# Altium PCB TCRT5000_SMT.PcbDoc
Units mil, origin at the board's own origin, x right, y up, seen from the top; angles counter-clockwise.
Board outline 6000 x 4000 mil, 2 copper layers (Top Layer, Bottom Layer); 18 components, 12 nets, 52 pads, 0 vias.
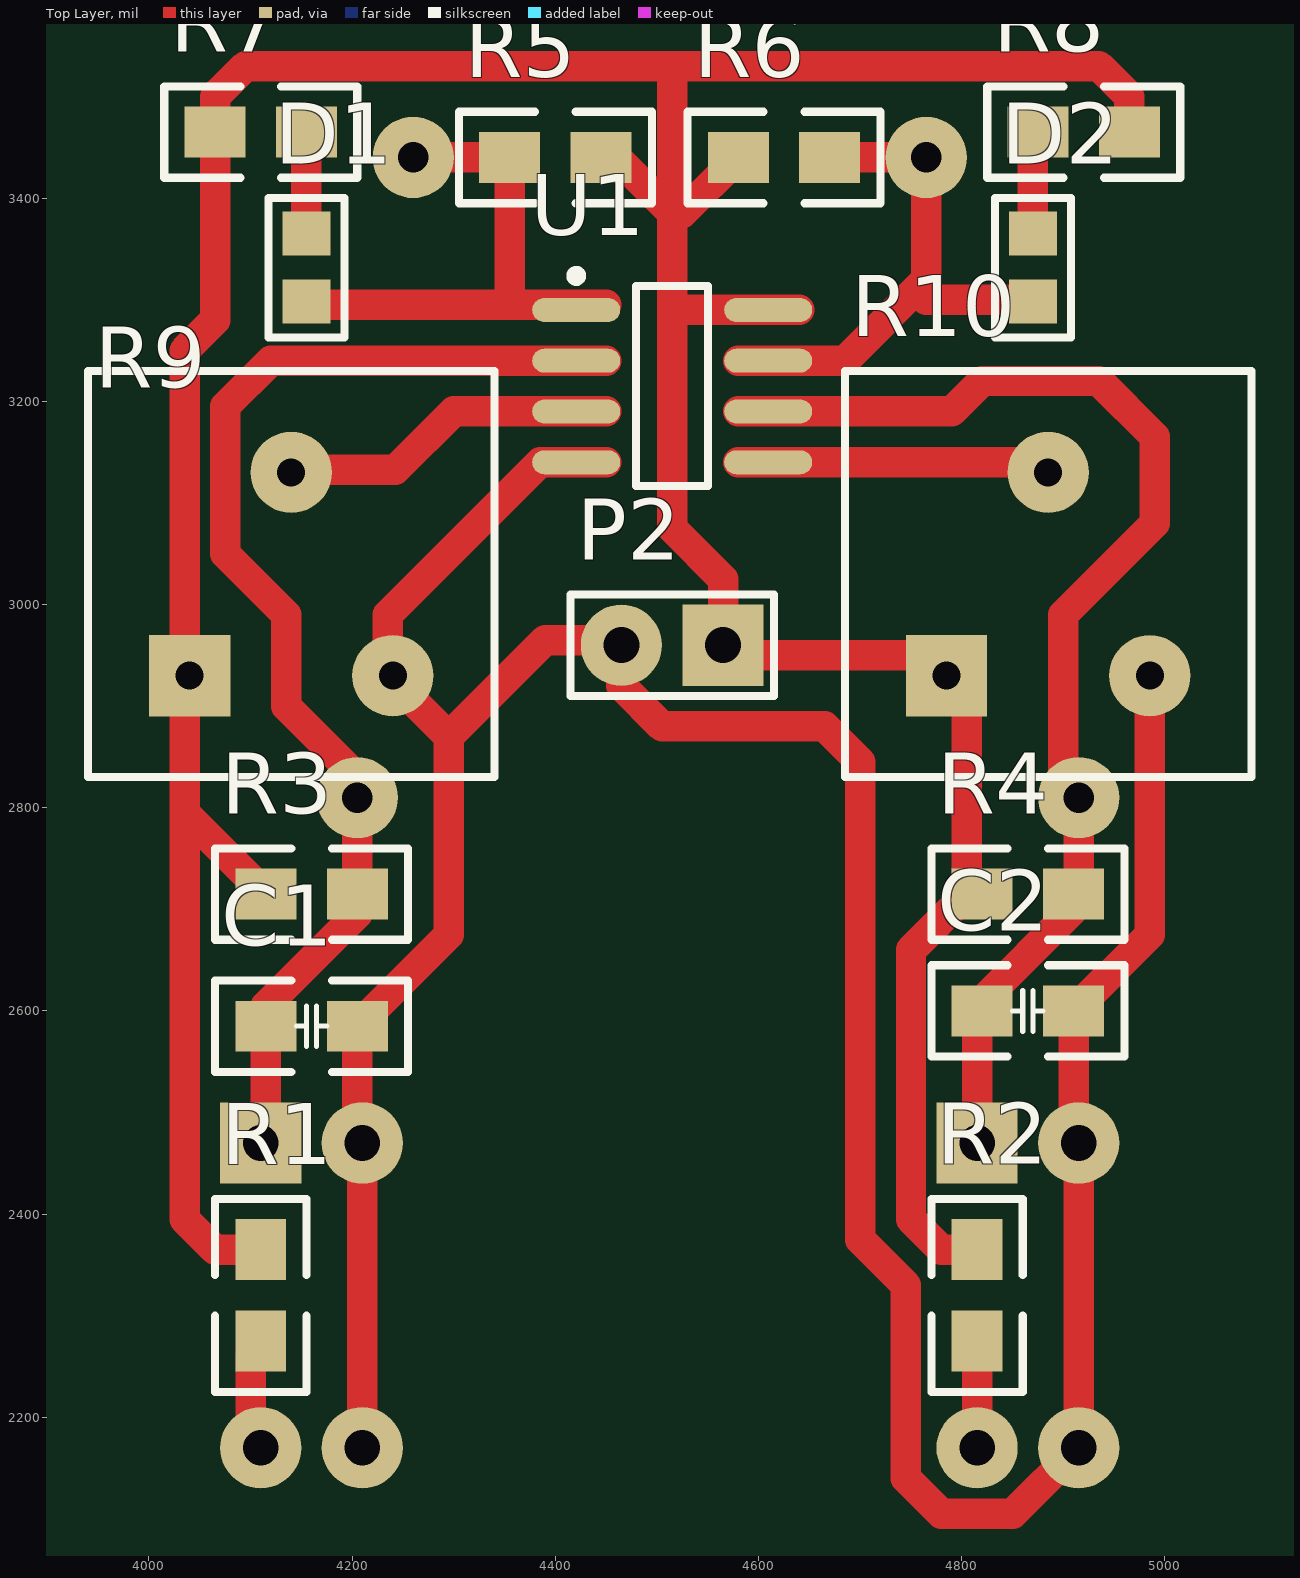
[diagram p0: Top Layer view]
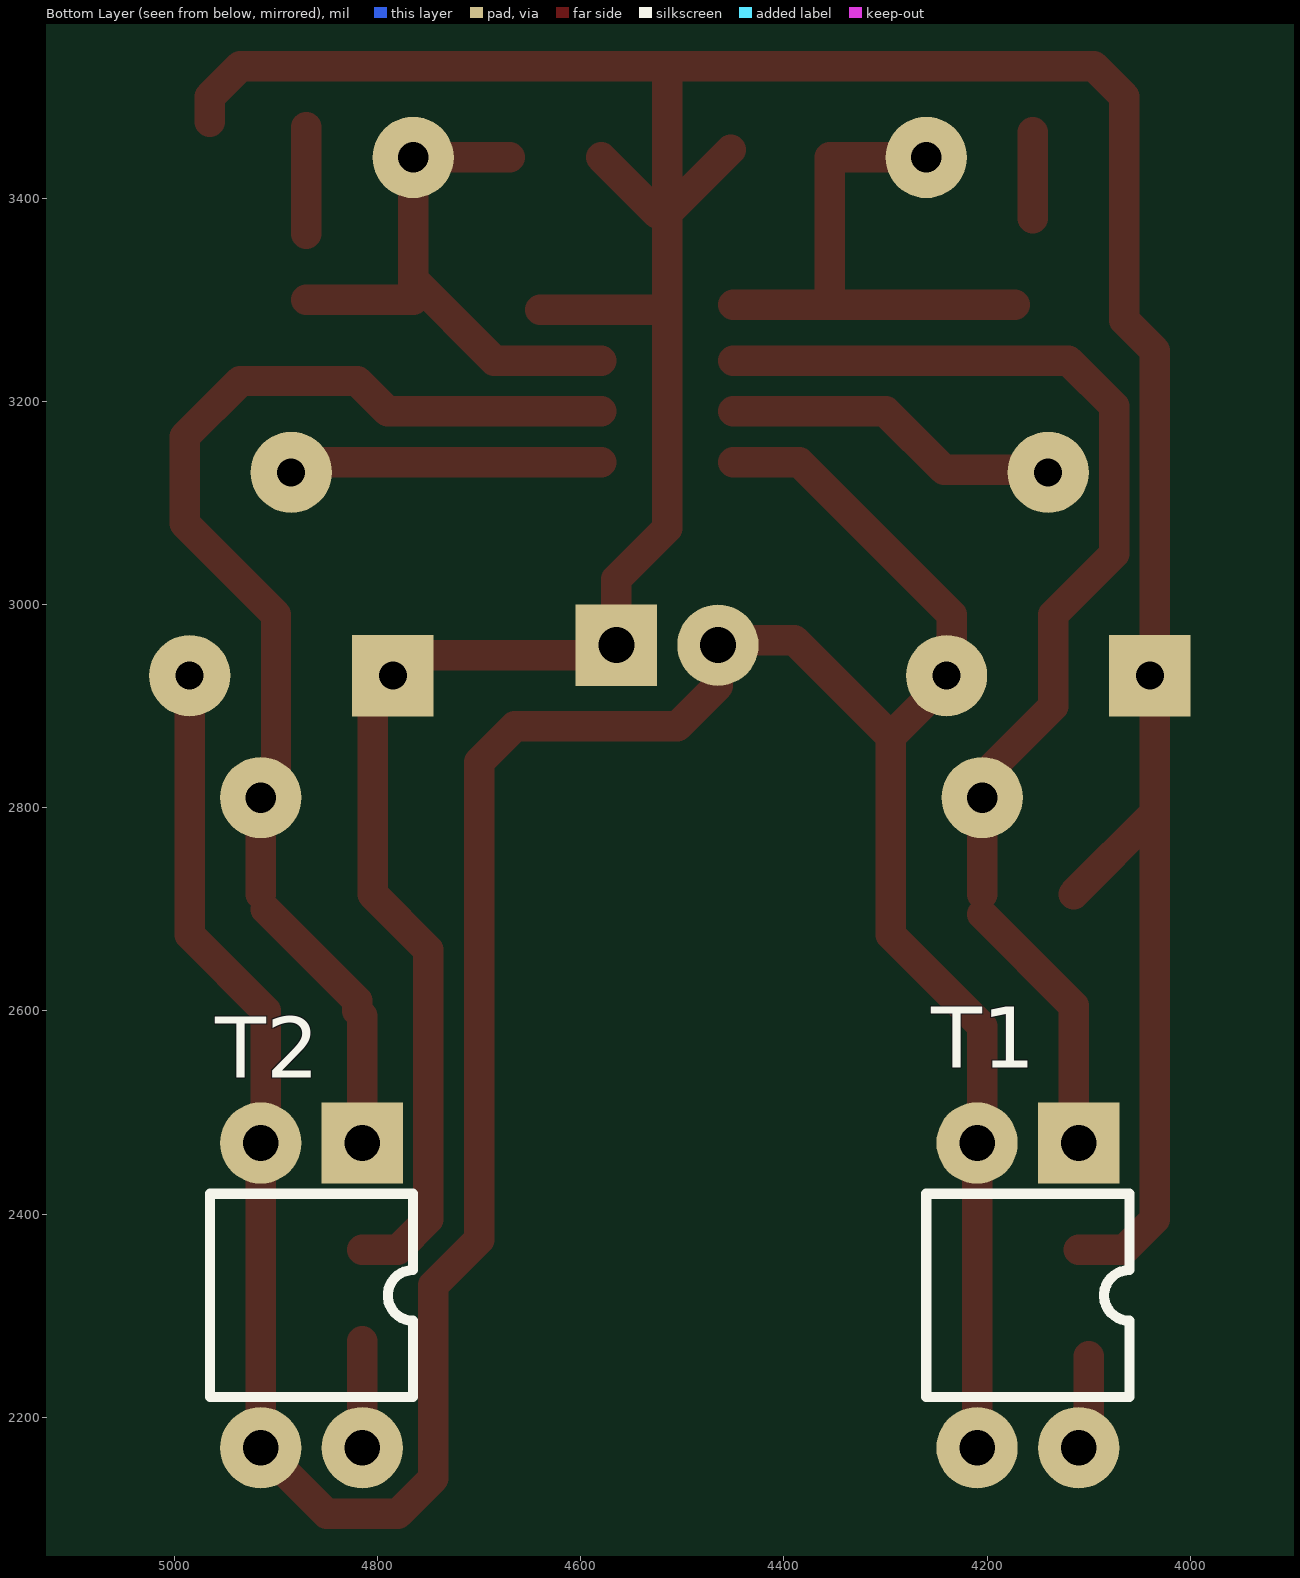
[diagram p1: Bottom Layer view, seen from below]

## Layer stack, top to bottom
Top Solder: solder mask 0.4, Solder Resist, Dk 3.5
Top Layer: signal copper 1.4
Dielectric 1: dielectric 12.6, FR-4, Dk 4.8
Bottom Layer: signal copper 1.4
Bottom Solder: solder mask 0.4, Solder Resist, Dk 3.5

## Board outline
1000,1000 7000,1000 7000,5000 1000,5000

## Design rules (kind name [scope] priority, off if disabled: settings)
Clearance [All] p1: gap=10
PolygonConnect [All] p1: connectstyle=Relief reliefconductorwidth=10 reliefentries=4 polygonreliefangle="90 Angle" airgapwidth=10
RoutingVias [All] p1: holewidth=28 width=50 viastyle="Through Hole" minholewidth=28 minwidth=50 maxholewidth=28 maxwidth=50
SolderMaskExpansion [All] p1: expansion=4
Width [All] p1: maxlimit=50 minlimit=15 preferedwidth=30
29 further rules are at their usual default settings.

## Components (designator, comment, footprint, x,y, rotation, side; value= is the part's Value field where it differs from the comment)
C1 "Cap Pol3" 0805C 4115,2585 r0 top
C2 "Cap Pol3" 0805C 4820,2600 r0 top
D1 "LED1" 0603L 4155,3365 r270 top
D2 "LED1" 0603L 4870,3365 r270 top
P2 "Header 2" HDR1X2 4565,2960 r180 top
R1 "Res2" 0805R 4110,2275 r90 top
R2 "Res2" 0805R 4815,2275 r90 top
R3 "Res2" 0805R 4115,2715 r0 top
R4 "Res2" 0805R 4820,2715 r0 top
R5 "Res2" 0805R 4445,3440 r180 top
R6 "Res2" 0805R 4580,3440 r0 top
R7 "Res2" 0805R 4065,3465 r0 top
R8 "Res2" 0805R 4965,3465 r180 top
R9 "Res Tap" VR4-2 4140,2980 r0 top
R10 "Res Tap" VR4-2 4885,2980 r0 top
T1 "TCRT5000" DIP-4N 4110,2470 r270 bottom
T2 "TCRT5000" DIP-4N 4815,2470 r270 bottom
U1 "LM393D" SO8_N 4515,3215 r0 top

## Footprints (in the part's own frame and the unit in brackets; to place one, negate y for a bottom-side part, rotate by r counter-clockwise, add the part's x,y. Pads: shape width x height; smd on the part's side, far side on the other; paste and mask are expansions set on the pad)
0603L [mm]
  rect 1.1x1.2 smd: 1(0,0) 2(1.7,0)
  silkscreen extent -0.9,-0.95 2.6,0.95
0805C [mil]
  rect 60x50 smd: 1(0,0) 2(90,0)
  silkscreen extent -50,-45 140,45
0805R [mil]
  rect 60x50 smd: 1(0,0) 2(90,0)
  silkscreen extent -50,-45 140,45
DIP-4N [mil]
  rect 80x80 hole 35: 1(0,0)
  round 80 hole 35: 2(0,-100) 3(300,-100) 4(300,0)
  silkscreen extent 50,-150 250,50
HDR1X2 [mil] "Connector; Header; 2 Position"
  rect 80x80 hole 35.43: 1(0,0)
  round 80 hole 35.43: 2(100,0)
  silkscreen extent -50,-50 150,50
SO8_N [mm] "SOIC, 8-Leads, Body 4.9x3.9mm, Pitch 1.27mm, IPC Medium Density"
  oval 2.2x0.6 smd: 1(-2.4,1.905) 2(-2.4,0.635) 3(-2.4,-0.635) 4(-2.4,-1.905) 5(2.4,-1.905) 6(2.4,-0.635) 7(2.4,0.635) 8(2.4,1.905)
  silkscreen extent -2.52,-2.5 0.9,2.88, body extent -1.95,-2.45 1.95,2.45, height 1.75
VR4-2 [mil] "Variable Resistor, Thru-Hole; 3 Leads"
  rect 80x80 hole 27.56: 1(-100,-50)
  round 80 hole 27.56: 2(0,150) 3(100,-50)
  silkscreen extent -200,-150 200,250

## Part data
C1 C2: "Polarized Capacitor (Surface Mount)"
D1 D2: "Typical RED GaAs LED"
P2: "Header, 2-Pin"
R1 R2 R3 R4 R5 R6 R7 R8: "Resistor"
R9 R10: "Tapped Resistor"
U1: "Low-Power Dual Voltage Comparator"

## Free pads (board coordinates)
  round 80 hole 30: 0(4260,3440) 1(4765,3440) 2(4205,2810) 3(4915,2810)

## Nets (pads, with @x,y where several pads share a name; then routed paths per layer and width w, separated by ;. In a path a pad name is that pad's centre, name@x,y a point inside that pad or via, vN(x,y) a via of type N, cw(c..) or ccw(c..) an arc to the next point about the centre after c; other vN are vias at no path point)
GND: C1.2 C2.2 P2.2 R9.3 R10.3 T1.2 T1.3 T2.2 T2.3 U1.4 | length 3410.8
  Top Layer w30: T1.2@4205,2460 C1.2 4295,2675 4295,2870 ; T1.3@4210,2155 T1.2@4210,2455 ; U1.4@4450,3140 4385,3140 4235,2990 4235,2930 4295,2870 ; T2.2@4910,2475 C2.2 4985,2675 R10.3 ; T2.2 T2.3 4850,2105 4780,2105 4745,2140 4745,2330 4700,2375 4700,2845 4665,2880 4505,2880 4465,2920 4465,2965 4390,2965 4295,2870
NetD1_1: D1.1 R7.2 | length 85
  Top Layer w30: D1.1@4155,3380 R7.2
NetD2_1: D2.1 R8.2 | length 105
  Top Layer w30: D2.1 R8.2@4870,3470
NetR1_1: R1.1 T1.4 | length 105
  Top Layer w30: T1.4@4100,2155 R1.1@4100,2260
NetR2_1: R2.1 T2.4 | length 105
  Top Layer w30: T2.4 R2.1
OUT1: D1.2 pad.0 R5.2 U1.1 | length 516.9
  Top Layer w30: D1.2@4173.07,3295 4355,3295 ; pad.0 R5.2 4355,3295 ; U1.1@4450,3295 4355,3295
OUT2: D2.2 pad.1 R6.2 U1.7 | length 558.1
  Top Layer w30: U1.7@4580,3240 4685,3240 4765,3320 ; R6.2 pad.1 4765,3300 D2.2@4870,3300
S1: C1.1 pad.2 R3.2 T1.1 U1.2 | length 1189.8
  Top Layer w30: T1.1@4115,2470 C1.1 4115,2605 R3.2@4205,2695 ; R3.2 4205,2830 4135,2900 4135,2990 4075,3050 4075,3195 4120,3240 U1.2@4450,3240
S2: C2.1 pad.3 R4.2 T2.1 U1.6 | length 1201
  Top Layer w30: U1.6@4580,3190 4790,3190 4820,3220 4935,3220 4990,3165 4990,3080 4900,2990 4900,2810 4915,2795 R4.2@4915,2715 ; T2.1 C2.1@4815,2595 ; C2.1 4820,2610 R4.2@4910,2700
V1: R9.2 U1.3 | length 336.3
  Top Layer w30: R9.2@4137.5,3132.5 4242.5,3132.5 4300,3190 U1.3@4450,3190
V2: R10.2 U1.5 | length 295
  Top Layer w30: U1.5@4580,3140 R10.2@4875,3140
VCC: P2.1 R1.2 R2.2 R3.1 R4.1 R5.1 R6.1 R7.1 R8.1 R9.1 R10.1 U1.8 | length 3954.9
  Top Layer w30: R1.2 4065,2365 4035,2395 4035,2795 ; R3.1 4035,2795 ; R5.1@4452.5,3447.5 4515,3385 ; P2.1 4565,3025 4515,3075 4515,3290 ; R6.1 4525,3385 4515,3385 ; 4605,2950 R10.1@4765,2950 ; U1.8@4640,3290 4515,3290 ; R10.1@4805,2930 4805,2715 4750,2660 4750,2395 4780,2365 R2.2 ; R8.1@4965,3475 4965,3500 4935,3530 4515,3530 ; 4035,2795 4035,3250 4065,3280 R7.1 4065,3500 4095,3530 4515,3530 ; 4515,3290 4515,3385 ; 4515,3385 4515,3530